# EAGLE board ClockMaster (EAGLE 7.7.0)

Size 29.14 x 106.5 mm. Coordinates in mm from the lower left corner, seen from the top.
Copper layers (1*16): Top 0.035mm / dielectric 1.5mm / Bottom 0.035mm
Design rules "ITEADstudio_DRC": minimum track width 6mil, minimum drill 12mil, track to track 6mil, track to pad 6mil, pad to pad 6mil, via to via 6mil, smd to smd 0mil, copper to edge 10mil, drill to drill 10mil, minimum pad ring 10mil, minimum via ring 6mil, stop-mask expansion 2mil, vias tented up to drill 100mil, thermal gap 10mil
Net classes: 0 default: clearance 0.178 mm; 1 GND: width 0.203 mm, drill 0.203 mm, clearance 0.203 mm

## Footprints (pad centres in the part's own frame; a part is rotated, then mirrored left to right if it is on the bottom)
C0603 = smd 0.889 x 0.889: 1 -0.762,0; 2 0.762,0
4P-6.0X6.0X5.0H = drill 1.016 pad 1.651 square: 1 -3.937,2.159 | drill 1.016 pad 1.651: 2 -3.937,-2.159; 3 3.937,-2.159; 4 3.937,2.159
PAD-1.5X4.5 = smd 1.5 x 2: P$1 0,0
R0603 = smd 0.889 x 0.889: 1 -0.762,0; 2 0.762,0
QFN50P400X400X100-25N = smd 1.2 x 0.3: 1 -2.2,1.245; 2 -2.2,0.762; 3 -2.2,0.254; 4 -2.2,-0.254; 5 -2.2,-0.762; 6 -2.2,-1.245; 13 2.2,-1.245; 14 2.2,-0.762; 15 2.2,-0.254; 16 2.2,0.254; 17 2.2,0.762; 18 2.2,1.245 | smd 0.3 x 1.2: 7 -1.245,-2.2; 8 -0.762,-2.2; 9 -0.254,-2.2; 10 0.254,-2.2; 11 0.762,-2.2; 12 1.245,-2.2; 19 1.245,2.2; 20 0.762,2.2; 21 0.254,2.2; 22 -0.254,2.2 | smd 0.305 x 1.2: 23 -0.762,2.2; 24 -1.245,2.2 | smd 2.032 x 2.032: 25 0,0
POWER_16 = drill 1.016 pad 1.88 octagon: 1 -6.35,-1.27; 2 -6.35,1.27; 3 -3.81,-1.27; 4 -3.81,1.27; 5 -1.27,-1.27; 6 -1.27,1.27; 7 1.27,-1.27; 8 1.27,1.27; 9 3.81,-1.27; 10 3.81,1.27; 11 6.35,-1.27; 12 6.35,1.27; 13 8.89,-1.27; 14 8.89,1.27; 15 11.43,-1.27; 16 11.43,1.27
3.5MM-JACK-SWITCH-13MM-INPUT = drill 0.8 pad 1.93 long: RING@3 -3.7,0; SECOND@3 0,-3.5; SWITCH@3 3.7,0; TIP@3 0,4.5
3.5MM-JACK-SWITCH-13MM-OUTPUT = drill 0.8 pad 1.93 long: RING@3 -3.7,0; SECOND@3 0,-3.5; SWITCH@3 3.7,0; TIP@3 0,4.5
OG-POTS_ALPS_POT_VERTICAL = drill 1 pad 1.88: P$1 -2.58,-6.7; P$2 0,-6.7; P$3 2.58,-6.7 | drill 2.2 pad 3.175: P$4 4.4,0; P$5 -4.4,0
0.49"-FPC-0.7-14-FOLDED = smd 0.35 x 2: P$1 -4.55,-1.49; P$2 -3.85,-1.49; P$3 -3.15,-1.49; P$4 -2.45,-1.49; P$5 -1.75,-1.49; P$6 -1.05,-1.49; P$7 -0.35,-1.49; P$8 0.35,-1.49; P$9 1.05,-1.49; P$10 1.75,-1.49; P$11 2.45,-1.49; P$12 3.15,-1.49; P$13 3.85,-1.49; P$14 4.55,-1.49

## Placement (x,y rotation side)
C1  2.2uF  [C0603]  -83.05,170.18 0 top  (outside the outline)
C2  4.7uF  [C0603]  -86.86,170.18 0 top  (outside the outline)
C3  1uF  [C0603]  -90.67,170.18 0 top  (outside the outline)
C4  1uF  [C0603]  -94.48,170.18 0 top  (outside the outline)
C5  1uF  [C0603]  -98.29,170.18 0 top  (outside the outline)
C6  1uF  [C0603]  -102.1,170.18 0 top  (outside the outline)
C9  1uF  [C0603]  -105.91,170.18 0 top  (outside the outline)
C10  100nF  [C0603]  -79.24,170.18 0 top  (outside the outline)
K1  BUTTON-4P-3110040P1  [4P-6.0X6.0X5.0H]  24.9,99.06 90 top
K2  BUTTON-4P-3110040P1  [4P-6.0X6.0X5.0H]  24.9,86.36 90 top
K3  BUTTON-4P-3110040P1  [4P-6.0X6.0X5.0H]  4.58,86.36 90 top
K4  BUTTON-4P-3110040P1  [4P-6.0X6.0X5.0H]  4.58,99.06 270 top
K5  BUTTON-4P-3110040P1  [4P-6.0X6.0X5.0H]  14.74,81.28 180 top
PTA6_MISO1  M01SMD-4.5X1.5  [PAD-1.5X4.5]  -108.45,168.91 0 top  (outside the outline)
PTA6_MISO2  M01SMD-4.5X1.5  [PAD-1.5X4.5]  -110.99,168.91 0 top  (outside the outline)
PTA6_MISO3  M01SMD-4.5X1.5  [PAD-1.5X4.5]  -113.53,168.91 0 top  (outside the outline)
PTA6_MISO4  M01SMD-4.5X1.5  [PAD-1.5X4.5]  -14.47,177.8 0 top  (outside the outline)
PTA6_MISO5  M01SMD-4.5X1.5  [PAD-1.5X4.5]  -22.09,86.36 0 top  (outside the outline)
R3  390K  [R0603]  -64,170.18 0 top  (outside the outline)
R4  2K  [R0603]  -69.08,170.18 0 top  (outside the outline)
R5  2K  [R0603]  -74.16,170.18 0 top  (outside the outline)
U1  MKL02Z32VFK4  [QFN50P400X400X100-25N]  -58.92,171.45 0 top  (outside the outline)
U$1  EURORACK_PCB6HP  [EURORACK6HPPCB]  -0.5,0 0 top
U$2  POWER  [POWER_16]  13.47,54.61 0 top
U$3  PJ-341  [3.5MM-JACK-SWITCH-13MM-INPUT]  7.12,43.18 180 top
U$4  PJ-341  [3.5MM-JACK-SWITCH-13MM-OUTPUT]  7.12,25.4 0 top
U$5  PJ-341  [3.5MM-JACK-SWITCH-13MM-OUTPUT]  22.36,25.4 0 top
U$6  PJ-341  [3.5MM-JACK-SWITCH-13MM-OUTPUT]  7.12,7.62 0 top
U$7  PJ-341  [3.5MM-JACK-SWITCH-13MM-OUTPUT]  22.36,7.62 0 top
U$8  [OG-POTS_ALPS_POT_VERTICAL]  14.74,66.04 0 top
U$9  0.49"OLEDFOLDED  [0.49"-FPC-0.7-14-FOLDED]  14.74,96.52 0 top

## Library data of the parts
C1-C6 C9 C10 R3-R5 = OPL
K1-K5 = zephod-components
PTA6_MISO1-PTA6_MISO5 = SparkFun-Connectors
U1 = FarnellThings; MPN: MKL02Z32VFK4; OC_FARNELL: 2321481; OC_NEWARK: 61W9887; PACKAGE: QFN-24; SUPPLIER: FREESCALE SEMICONDUCTOR
U$1 U$2 = EurorackModularParts
U$3 = EurorackModularParts; DESC: PlayPause; MPN: PJ-341
U$4 = EurorackModularParts; DESC: CLOCK1; MPN: PJ-341
U$5 = EurorackModularParts; DESC: CLOCK2; MPN: PJ-341
U$6 = EurorackModularParts; DESC: CLOCK3; MPN: PJ-341
U$7 = EurorackModularParts; DESC: CLOCK4; MPN: PJ-341
U$8 = EurorackModularParts; DESC: Tempo
U$9 = zephod-tft

## Nets
3.3V: C5.2 C6.2 C9.2 C10.2 PTA6_MISO1.P$1 R4.2 R5.2 U1.3 U$9.P$5 U$9.P$8
AUDIO: U1.7
AUDIOHEADPHONE: U1.8
AUDIOSELECTOR: U1.21
BUTTON1: K1.1 U1.10
BUTTON2: K3.1 K5.1 U1.15
BUTTON3: K4.1 U1.2
BUTTON4: K2.1 U1.9
DATAIN: U1.20
GND [GND]: C1.2 C2.1 C5.1 C6.1 C9.1 C10.1 K1.2 K1.3 K2.2 K2.3 K3.2 K3.3 K4.2 K4.3 K5.2 K5.3 PTA6_MISO5.P$1 R3.1 U1.25 U$9.P$7
LED1: U1.11
LED2: U1.16
N$1 [GND]: U1.4
N$3: C3.2 U$9.P$1
N$4: C4.2 U$9.P$3
N$9: R3.2 U$9.P$12
N$10: C1.1 U$9.P$14
N$11: C2.2 U$9.P$13
N$12: C3.1 U$9.P$2
N$13: C4.1 U$9.P$4
OLED_RESET: U1.19 U$9.P$9
OLED_SCL: R4.1 U1.17 U$9.P$10
OLED_SDA: R5.1 U1.18 U$9.P$11
PTB1: U1.13
PTB2: U1.14
RESET: PTA6_MISO4.P$1 U1.23
SWCLK: PTA6_MISO3.P$1 U1.22
SWDIO: PTA6_MISO2.P$1 U1.24

## Tracks (layer width: path | path; a pad name or v marks a point on that pad's centre or on a via)
3.3V  (9 unrouted)
BUTTON1  (1 unrouted)
BUTTON2  (2 unrouted)
BUTTON3  (1 unrouted)
BUTTON4  (1 unrouted)
GND  (19 unrouted)
N$3  (1 unrouted)
N$4  (1 unrouted)
N$9  (1 unrouted)
N$10  (1 unrouted)
N$11  (1 unrouted)
N$12  (1 unrouted)
N$13  (1 unrouted)
OLED_RESET  (1 unrouted)
OLED_SCL  (2 unrouted)
OLED_SDA  (2 unrouted)
RESET  (1 unrouted)
SWCLK  (1 unrouted)
SWDIO  (1 unrouted)